# EAGLE board AetherTap100 (EAGLE 5.07)
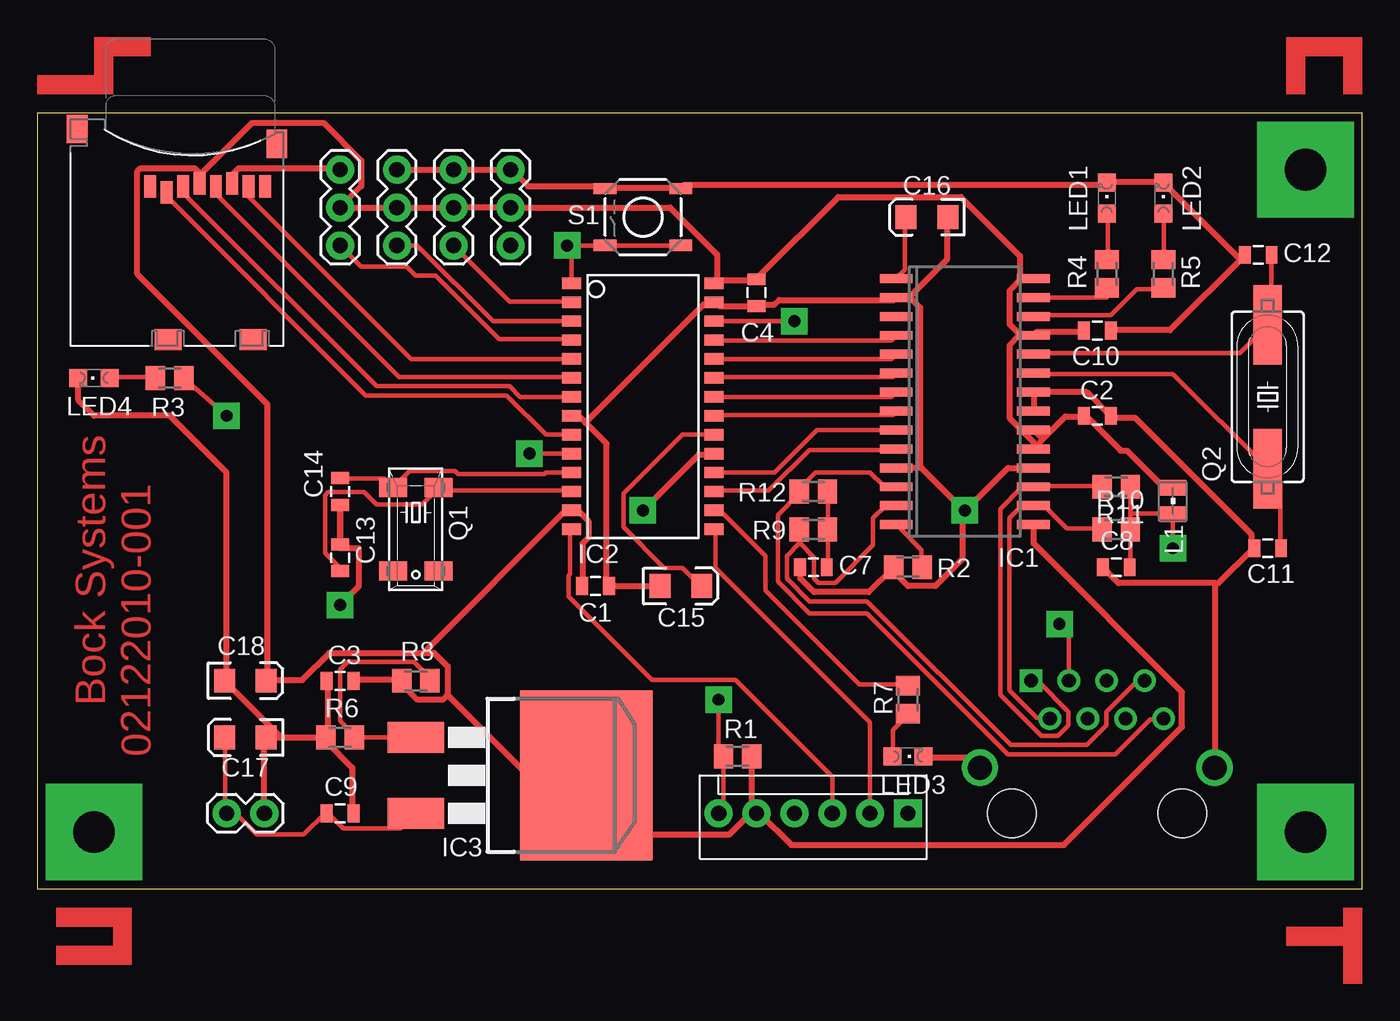
[diagram p0: board, top side]
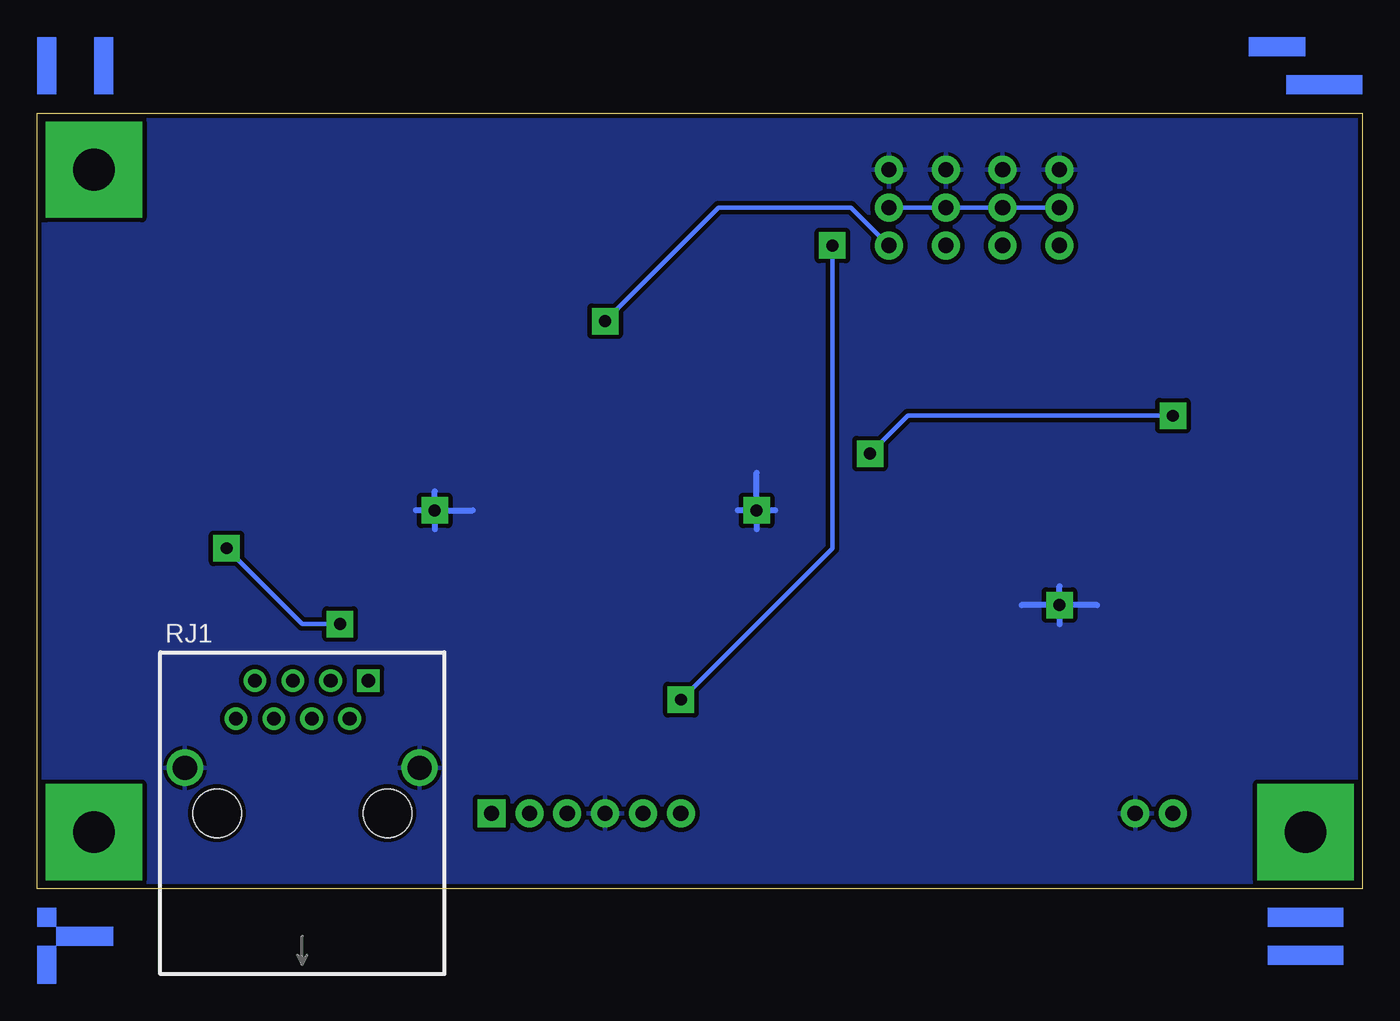
[diagram p1: board, bottom side, seen from below]

Size 88.9 x 52.07 mm. Coordinates in mm from the lower left corner, seen from the top.
Outline: 0,0 88.9,0 88.9,52.07 0,52.07 0,0
Copper layers (1*16): Top 0.035mm / dielectric 1.5mm / Bottom 0.035mm
Design rules "DesignRules *": minimum track width 12mil, minimum drill 20mil, track to track 8mil, track to pad 8mil, pad to pad 8mil, via to via 8mil, smd to smd 8mil, copper to edge 10mil, drill to drill 8mil, minimum pad ring 12mil, minimum via ring 10mil, stop-mask expansion 4mil, vias tented up to drill 25mil, thermal gap 10mil
Net classes: 0 default: width 0.305 mm, clearance 0.254 mm; 1 GND: width 0.406 mm, clearance 0.254 mm; 2 VCC: width 0.406 mm, clearance 0.254 mm

## Footprints (pad centres in the part's own frame; a part is rotated, then mirrored left to right if it is on the bottom)
0805 = smd 0.8 x 1.2: 1 -0.9,0; 2 0.9,0
EIA3216 = smd 1.4 x 1.6: A 1.4,0; C -1.4,0
SO28W = smd 0.6 x 2.2: 1 -8.255,-4.6; 2 -6.985,-4.6; 3 -5.715,-4.6; 4 -4.445,-4.6; 5 -3.175,-4.6; 6 -1.905,-4.6; 7 -0.635,-4.6; 8 0.635,-4.6; 9 1.905,-4.6; 10 3.175,-4.6; 11 4.445,-4.6; 12 5.715,-4.6; 13 6.985,-4.6; 14 8.255,-4.6; 15 8.255,4.6; 16 6.985,4.6; 17 5.715,4.6; 18 4.445,4.6; 19 3.175,4.6; 20 1.905,4.6; 21 0.635,4.6; 22 -0.635,4.6; 23 -1.905,4.6; 24 -3.175,4.6; 25 -4.445,4.6; 26 -5.715,4.6; 27 -6.985,4.6; 28 -8.255,4.6
SO28W' = smd 0.762 x 1.27: 1 -8.89,-4.78; 2 -7.62,-4.78; 3 -6.35,-4.78; 4 -5.08,-4.78; 5 -3.81,-4.78; 6 -2.54,-4.78; 7 -1.27,-4.78; 8 0,-4.78; 9 1.27,-4.78; 10 2.54,-4.78; 11 3.81,-4.78; 12 5.08,-4.78; 13 6.35,-4.78; 14 7.62,-4.78; 15 7.62,4.78; 16 6.35,4.78; 17 5.08,4.78; 18 3.81,4.78; 19 2.54,4.78; 20 1.27,4.78; 21 0,4.78; 22 -1.27,4.78; 23 -2.54,4.78; 24 -3.81,4.78; 25 -5.08,4.78; 26 -6.35,4.78; 27 -7.62,4.78; 28 -8.89,4.78
D2PACK = smd 2.083 x 3.81: 1 -2.54,-8.89; 3 2.54,-8.89 | smd 11.43 x 8.89: 2 0,2.54
MOLEX-1X6 = drill 1.016 pad 1.88 square: 1 0,0 | drill 1.016 pad 1.88 round: 2 2.54,0; 3 5.08,0; 4 7.62,0; 5 10.16,0; 6 12.7,0
1X03 = drill 1.016 pad 1.88 round: 1 0,0; 2 2.54,0; 3 5.08,0
1X02 = drill 1.016 pad 1.88 round: 1 0,0; 2 2.54,0
WE-KI_0805_B = smd 1.02 x 1.78: 1 -0.89,0; 2 0.89,0
CHIPLED_0805 = smd 1.2 x 1.2: A 0,-1.05; C 0,1.05
MM20SS = smd 1.27 x 1.88: 1 -2.794,-1.524; 2 2.794,-1.524; 3 2.794,1.524; 4 -2.794,1.524
HC49UP = smd 5.334 x 1.93: 1 -4.826,0; 2 4.826,0
M0805 = smd 1.3 x 1.6: 1 -0.95,0; 2 0.95,0
PJ-J1 = drill 0.914 square: 1 4.445,8.89 | drill 0.914 round: 2 3.175,6.35; 3 1.905,8.89; 4 0.635,6.35; 5 -0.635,8.89; 6 -1.905,6.35; 7 -3.175,8.89; 8 -4.445,6.35 | drill 1.626 round: S1 7.874,3.048; S2 -7.874,3.048 | hole 3.251: 5.715,0; -5.715,0
TACTILE_SWITCH_SMD = smd 1.524 x 0.762: 1 -2.54,1.905; 2 2.54,1.905; 3 -2.54,-1.905; 4 2.54,-1.905
MICROSD = smd 0.8 x 1.5: 1 -1.94,2.7; 2 -0.84,2.3; 3 0.26,2.7; 4 1.36,2.9; 5 2.46,2.7; 6 3.56,2.9; 7 4.66,2.7; 8 5.76,2.7 | smd 1.4 x 1.9: NC -6.85,6.55; NC3 6.55,5.55 | smd 1.8 x 1.4: NC1 -0.75,-7.6; NC2 4.95,-7.6

## Placement (x,y rotation side)
C1  0.1uF  [0805]  37.47,20.32 180 top
C2  0.1uF  [0805]  71.12,31.75 180 top
C3  0.1uF  [0805]  20.32,13.97 180 top
C4  0.1uF  [0805]  48.26,40.01 270 top
C7  0.1uF  [0805]  52.07,21.59 180 top
C8  0.1uF  [0805]  72.39,21.59 0 top
C9  0.1uF  [0805]  20.32,5.08 0 top
C10  0.1uF  [0805]  71.12,37.47 0 top
C11  27pF  [0805]  82.55,22.86 0 top
C12  27pF  [0805]  81.92,42.55 180 top
C13  27pF  [0805]  20.32,22.23 90 top
C14  27pF  [0805]  20.32,26.67 90 top
C15  10uF  [EIA3216]  43.18,20.32 0 top
C16  10uF  [EIA3216]  59.69,45.09 180 top
C17  10uF  [EIA3216]  13.97,10.16 180 top
C18  10uF  [EIA3216]  13.97,13.97 0 top
IC1  [SO28W]  62.23,32.7 270 top
IC2  PIC24FJ64GA002  [SO28W']  40.64,31.75 270 top
IC3  LM317BD2T  [D2PACK]  34.29,7.62 270 top
ICSP  PIC-ICSPPTH  [MOLEX-1X6]  58.42,5.08 180 top
JP1  [1X03]  27.94,48.26 270 top
JP2  [1X03]  24.13,48.26 270 top
JP3  [1X03]  20.32,48.26 270 top
JP4  [1X03]  31.75,48.26 270 top
JP5  [1X02]  15.24,5.08 180 top
L1  60Ohm  [WE-KI_0805_B]  76.2,26.04 90 top
LED1  [CHIPLED_0805]  71.75,46.35 0 top
LED2  [CHIPLED_0805]  75.56,46.35 0 top
LED3  [CHIPLED_0805]  58.42,8.89 270 top
LED4  [CHIPLED_0805]  3.81,34.29 90 top
Q1  32Khz  [MM20SS]  25.4,24.13 270 top
Q2  25Mhz  [HC49UP]  82.55,33.02 90 top
R1  2K0  [M0805]  46.99,8.89 180 top
R2  2K0  [M0805]  58.42,21.59 180 top
R3  390  [M0805]  8.89,34.29 180 top
R4  390  [M0805]  71.75,41.27 90 top
R5  390  [M0805]  75.56,41.27 90 top
R6  390  [M0805]  20.32,10.16 0 top
R7  390  [M0805]  58.42,12.7 90 top
R8  240  [M0805]  25.4,13.97 0 top
R9  50  [M0805]  52.07,24.13 180 top
R10  50  [M0805]  72.39,24.13 0 top
R11  50  [M0805]  72.39,26.99 0 top
R12  50  [M0805]  52.07,26.67 180 top
RJ1  J1006  [PJ-J1]  71.12,5.08 0 bottom
S1  [TACTILE_SWITCH_SMD]  40.64,45.09 180 top
SD1  SF-MICROSD  [MICROSD]  9.53,44.45 0 top

## Library data of the parts
C1-C4 C7-C18 ICSP JP1-JP5 S1 = SparkFun
IC1 = microchip-enc28j60
IC2 = microchip-pic24
IC3 = v-reg
L1 = wuerth-elektronik
LED1-LED4 = led
Q1 Q2 = crystal
R1-R12 = resistor
RJ1 = con-pulse-j1006
SD1 = microsd

## Nets
CLK1: C14.2 IC2.11 Q1.1
CLK2: C13.1 IC2.12 Q1.4
CTT: C8.2 L1.1 R10.2 R11.2 RJ1.3
ETH-CLK: IC1.8 IC2.21
ETH-CS: IC1.9 IC2.18
ETH-INT: IC1.4 IC2.25
ETH-LED: IC2.16 R7.2
ETH-MISO: IC1.6 IC2.23
ETH-MOSI: IC1.7 IC2.22
ETH-RST: IC1.10 IC2.17
ETH-WOL: IC1.5 IC2.24
GND [GND]: C1.1 C2.1 C3.2 C4.2 C7.2 C8.1 C9.2 C10.2 C11.1 C12.2 C13.2 C14.1 C15.C C16.C C17.C C18.C IC1.2 IC1.11 IC1.18 IC1.21 IC1.22 IC2.8 IC2.19 IC2.27 ICSP.4 JP1.1 JP2.1 JP3.1 JP4.1 JP5.1 LED1.C LED2.C LED3.C LED4.C R2.2 R6.1 RJ1.S1 RJ1.S2 S1.3 S1.4 SD1.6
LVP/AUX: ICSP.1
MCLR: IC2.1 ICSP.6 R1.2 S1.1 S1.2
MISO: IC2.5 SD1.7
MOSI: IC2.7 SD1.3
N$1: LED1.A R4.2
N$2: LED2.A R5.2
N$3: LED3.A R7.1
N$4: C16.A IC1.1
N$5: C9.1 C17.A IC3.3 JP5.2
N$6: IC1.14 R2.1
N$7: IC3.1 R6.2 R8.2
N$9: LED4.A R3.2
N$13: C7.1 R9.1 R12.1
N$16: IC1.26 R5.1
N$24: IC1.27 R4.1
OSC1: C11.2 IC1.23 Q2.1
OSC2: C12.1 IC1.24 Q2.2
PGC3: IC2.15 ICSP.2
PGD3: IC2.14 ICSP.3
RA0: IC2.2 JP1.3
RA1: IC2.3 JP2.3
RB0: IC2.4 JP3.3
RB15: IC2.26 JP4.3
SDCLK: IC2.6 SD1.5
SDCS: IC2.9 SD1.2
SDLED: IC2.10 R3.1
TPIN+: IC1.13 R9.2 RJ1.7
TPIN-: IC1.12 R12.2 RJ1.8
TPOUT+: IC1.17 R11.1 RJ1.1
TPOUT-: IC1.16 R10.1 RJ1.2
VCAP: C15.A IC2.20
VCC [GND]: C1.2 C2.2 C3.1 C4.1 C10.1 C18.A IC1.15 IC1.19 IC1.20 IC1.25 IC1.28 IC2.13 IC2.28 IC3.2 ICSP.5 JP1.2 JP2.2 JP3.2 JP4.2 L1.2 R1.1 R8.1 SD1.4

## Tracks (layer width: path | path; a pad name or v marks a point on that pad's centre or on a via)
CLK1
  Top 0.305: C14.2 20.32,27.53 23.27,27.53 Q1.1 24.99,28.04 28.04,28.04 28.25,27.84 34.04,27.84 34.14,27.94 IC2.11
CLK2
  Top 0.305: C13.1 20.32,21.54 19.3,22.55 19.3,26.42 19.51,26.62 21.95,26.62 22.76,25.81 25.81,25.81 Q1.4 26.92,26.72 35.76,26.72 IC2.12
CTT  (via drill 0.8 pad 1.78)
  Top 0.305: C8.2 73.36,21.64 73.36,24.08 R10.2 73.36,24.28 73.36,25.2 | 73.36,25.2 73.36,26.92 R11.2 | 73.36,25.2 76.2,25.2 L1.1 v76.2,22.86 | RJ1.3 69.22,17.14 v68.58,17.78
  Bottom 0.305: v68.58,17.78 71.12,17.78 v76.2,22.86
ETH-CLK
  Top 0.305: IC2.21 45.52,31.8 57.4,31.8 57.61,32 IC1.8
ETH-CS
  Top 0.305: IC2.18 49.48,27.94 52.32,30.79 57.61,30.79 IC1.9
ETH-INT
  Top 0.305: IC2.25 45.52,36.78 57.3,36.78 57.61,37.08 IC1.4
ETH-LED
  Top 0.305: IC2.16 45.82,25.4 48.87,22.35 48.87,20.02 55.17,13.72 58.42,13.72 R7.2
ETH-MISO
  Top 0.305: IC2.23 45.52,34.34 57.4,34.34 57.61,34.54 IC1.6
ETH-MOSI
  Top 0.305: IC2.22 57.3,33.02 57.61,33.33 IC1.7
ETH-RST
  Top 0.305: IC2.17 45.52,26.72 49.07,26.72 51.82,29.46 57.61,29.46 IC1.10
ETH-WOL
  Top 0.305: IC2.24 57.3,35.56 57.61,35.87 IC1.5
GND  (via drill 0.8 pad 1.78)
  Top 0.406: C15.C C1.1 38.2,20.42 38.2,29.87 36.78,31.29 | 36.78,31.29 36.37,31.7 35.87,31.7 IC2.8 | C16.C 61.06,45.01 61.06,42.27 58.52,39.73 57.71,39.73 IC1.2 | IC1.2 57.51,39.52 49.78,39.52 49.48,39.22 48.36,39.22 C4.2 45.72,39.12 45.52,39.32 IC2.27 45.31,39.22 44.7,39.22 36.78,31.29 | C10.2 72.03,37.49 76,37.49 80.97,42.47 C12.2 80.67,42.27 75.69,47.24 LED2.C 75.49,47.45 71.83,47.45 LED1.C 71.63,47.24 43.38,47.24 43.28,47.14 S1.3 43.18,47.04 38.1,47.04 S1.4 38,47.14 32.92,47.14 31.8,48.26 JP4.1 JP2.1 | IC1.21 66.85,32.11 66.85,33.12 IC1.22 66.85,33.33 70.41,33.33 71.93,31.8 C2.1 72.14,31.6 73.66,31.6 81.48,23.77 81.48,22.96 C11.1 81.58,22.86 79.25,20.52 79.05,20.52 | C9.2 21.13,5.08 21.13,8.13 19.41,9.86 19.41,10.16 R6.1 | C3.2 19.51,13.92 19.51,10.26 R6.1 | 16.26,10.16 C17.C 15.24,10.06 JP5.1 | 16.26,10.16 R6.1 | 16.26,10.16 16.26,10.26 12.6,13.92 C18.C 12.7,14.1 12.7,27.94 8.89,31.75 3.81,31.75 2.76,32.8 LED4.C | C13.2 C14.1 20.32,22.86 21.59,22.86 21.59,20.32 v20.32,19.05 | LED3.C 59.54,8.84 62.48,8.84 63.2,8.13 RJ1.S1 | v40.64,25.4 44.4,29.16 45.41,29.16 IC2.19 | 59.23,28.25 59.33,28.25 62.18,25.4 v62.23,25.4 | 59.23,28.25 57.71,28.25 IC1.11 | IC1.18 66.75,28.25 65.13,28.25 62.38,25.5 v62.23,25.4 | 78.94,8.13 RJ1.S2 79.05,8.23 79.05,20.52 | IC1.2 58.62,39.62 59.23,39.01 59.23,28.25 | v62.23,25.4 62.08,25.3 | C7.2 51.21,21.54 51.21,20.83 52.12,19.91 55.78,19.91 57.4,21.54 R2.2 57.4,21.34 58.42,20.32 60.25,20.32 62.08,22.15 62.08,25.09 v62.23,25.4 | 79.05,20.52 72.54,20.52 71.53,21.54 C8.1 | JP3.1 20.22,48.36 13.51,48.36 13.11,47.95 13.11,47.45 SD1.6
  Bottom 0.406: 17.78,19.05 v20.32,19.05 | v20.32,19.05 22.86,19.05 | v20.32,19.05 20.32,20.32 | v20.32,19.05 20.32,17.78 | v40.64,25.4 40.64,27.94 | v40.64,25.4 40.64,24.13 | 39.37,25.4 v40.64,25.4 | v40.64,25.4 41.91,25.4 | v62.23,25.4 59.69,25.4 | v62.23,25.4 63.5,25.4 | v62.23,25.4 62.23,26.67 | v62.23,25.4 62.23,24.13
  pour Bottom (isolate 0.305): 0,57.15 0,0 88.9,0 88.9,57.15
MCLR  (via drill 0.8 pad 1.78)
  Top 0.305: ICSP.6 46.04,5.4 R1.2 45.72,9.21 v45.72,12.7 | IC2.1 35.87,43.08 v35.56,43.18 S1.2 S1.1
  Bottom 0.305: v45.72,12.7 35.56,22.86 v35.56,43.18
MISO
  Top 0.305: IC2.5 25.09,35.56 14.22,46.43 14.22,47.14 SD1.7
MOSI
  Top 0.305: IC2.7 32.41,33.02 31.7,33.73 22.76,33.73 9.86,46.63 9.86,47.14 SD1.3
N$1
  Top 0.305: LED1.A 71.83,45.21 71.83,42.27 R4.2
N$2
  Top 0.305: LED2.A 75.59,45.21 75.59,42.27 R5.2
N$3
  Top 0.305: LED3.A 57.4,8.94 57.4,10.67 58.42,11.68 R7.1
N$4
  Top 0.305: C16.A 58.22,45.01 58.22,41.55 57.71,41.05 IC1.1
N$5
  Top 0.305: C17.A 12.6,10.16 12.6,5.18 JP5.2 12.8,4.98 13.41,4.98 14.73,3.66 17.88,3.66 19.3,5.08 C9.1 19.51,5.08 20.52,4.06 24.38,4.06 IC3.3
N$6
  Top 0.305: 57.71,24.38 IC1.14 57.81,24.28 59.33,22.76 59.33,21.64 R2.1
N$7
  Top 0.305: IC3.1 R6.2 21.34,10.26 20.32,11.28 20.32,14.73 20.83,15.24 25.3,15.24 26.31,14.22 26.31,14.02 R8.2
N$8  (via drill 2.8 pad 6.45)
  other vias: 85.09,48.26
N$9
  Top 0.305: LED4.A 4.88,34.34 7.92,34.34 R3.2
N$10  (via drill 2.8 pad 6.45)
  other vias: 85.09,3.81
N$11  (via drill 0.8 pad 1.78)
  other vias: 20.32,19.05
N$12  (via drill 2.8 pad 6.45)
  other vias: 3.81,3.81
N$13
  Top 0.305: C7.1 53.03,21.64 53.03,24.08 R9.1 53.03,24.28 53.03,26.62 R12.1
N$14  (via drill 0.8 pad 1.78)
  other vias: 40.64,25.4
N$15  (via drill 0.8 pad 1.78)
  other vias: 62.23,25.4
N$16
  Top 0.305: R5.1 75.49,40.23 73.76,40.23 72.03,38.51 66.85,38.51 IC1.26
N$24
  Top 0.305: IC1.27 71.75,39.69 R4.1
OSC1
  Top 0.305: C11.2 83.41,22.86 83.41,27.33 Q2.1 76.2,34.54 66.85,34.54 IC1.23
OSC2
  Top 0.305: C12.1 82.8,42.47 82.8,38.1 Q2.2 80.67,35.97 66.85,35.97 IC1.24
PGC3
  Top 0.305: ICSP.2 55.88,11.18 45.52,21.54 45.52,24.08 IC2.15
PGD3
  Top 0.305: ICSP.3 53.34,7.52 46.84,14.02 41.25,14.02 35.66,19.61 35.66,21.03 35.76,21.13 35.76,24.08 IC2.14
RA0
  Top 0.305: JP1.3 31.7,39.42 35.76,39.42 IC2.2
RA1
  Top 0.305: IC2.3 30.58,38.1 25.5,43.18 JP2.3
RB0
  Top 0.305: JP3.3 21.74,41.76 24.79,41.76 25.4,41.15 26.72,41.15 30.99,36.88 35.76,36.88 IC2.4
RB15  (via drill 0.8 pad 1.78)
  Top 0.305: v50.8,38.1 IC2.26
  Bottom 0.305: v50.8,38.1 43.18,45.72 34.29,45.72 JP4.3
SDCLK
  Top 0.305: IC2.6 35.76,34.34 24.28,34.34 11.99,46.63 SD1.5
SDCS
  Top 0.305: IC2.9 34.14,30.48 31.5,33.12 22.05,33.12 8.74,46.43 8.74,46.74 SD1.2
SDLED  (via drill 0.8 pad 1.78)
  Top 0.305: v33.02,29.21 IC2.10 | R3.1 v12.7,31.75
  Bottom 0.305: v33.02,29.21 30.48,31.75 v12.7,31.75
TPIN+
  Top 0.305: 51.21,23.16 51.21,24.08 R9.2 | 51.21,23.16 52.12,22.25 52.12,20.83 52.43,20.52 53.54,20.52 56.08,23.06 56.08,24.89 56.9,25.7 57.61,25.7 IC1.13 | RJ1.7 74.27,13.92 73.76,13.92 71.73,11.89 71.73,10.97 70.41,9.65 65.33,9.65 55.68,19.3 51.82,19.3 50.29,20.83 50.29,22.35 51.1,23.16 51.21,23.16
TPIN-
  Top 0.305: IC1.12 57.61,27.03 56.79,27.03 55.88,27.94 52.22,27.94 51.21,26.92 51.21,26.72 R12.2 51.1,26.52 49.68,25.09 49.68,20.62 51.82,18.49 55.68,18.49 65.13,9.04 72.34,9.04 74.68,11.38 75.49,11.38 RJ1.8
TPOUT+
  Top 0.305: R11.1 71.42,27.03 66.85,27.03 IC1.17 66.75,26.92 66.04,26.92 64.62,25.5 64.62,13.01 67.36,10.26 68.48,10.26 69.19,10.97 69.19,11.89 67.16,13.92 66.75,13.92 RJ1.1
TPOUT-
  Top 0.305: R10.1 71.42,24.18 69.09,24.18 67.56,25.7 66.85,25.7 IC1.16 66.75,25.6 65.94,25.6 65.23,24.89 65.23,13.31 67.06,11.48 67.87,11.48 RJ1.2
VCAP
  Top 0.305: IC2.20 43.28,30.48 39.32,26.52 39.32,24.28 42.06,21.54 43.28,21.54 44.5,20.32 C15.A
VCC
  Top 0.406: ICSP.5 47.95,5.38 47.95,8.84 R1.1 | C1.2 36.58,23.16 36.98,23.57 36.98,24.69 36.27,25.4 IC2.13 35.46,25.4 26.01,15.95 26.01,15.85 | C3.1 21.23,14.02 24.38,14.02 R8.1 24.38,13.82 25.5,12.7 27.23,12.7 27.53,13.01 | 26.01,15.85 26.62,15.85 27.53,14.94 27.53,13.01 | 26.01,15.85 19.61,15.85 17.78,14.02 15.44,14.02 C18.A 15.44,14.22 15.44,32.51 6.71,41.25 6.71,48.16 6.91,48.36 10.57,48.36 10.87,48.06 SD1.4 10.97,47.45 10.97,47.95 14.43,51.41 19.2,51.41 21.74,48.87 21.74,47.14 JP3.2 JP2.2 JP1.2 JP4.2 42.47,45.72 45.62,42.57 45.62,40.95 IC2.28 45.52,40.64 45.72,40.84 48.26,40.84 C4.1 48.36,41.05 53.75,46.43 61.98,46.43 65.94,42.47 65.94,41.05 IC1.28 66.75,40.95 66.04,40.95 65.23,40.13 65.23,37.9 65.94,37.19 66.65,37.19 IC1.25 | 27.53,13.01 32.92,7.62 IC3.2 36.98,7.52 40.84,3.66 46.43,3.66 47.95,5.18 ICSP.5 | C10.1 70.21,37.39 67.06,37.39 66.85,37.19 IC1.25 | 67.06,29.77 66.85,29.57 IC1.19 | 67.06,29.77 67.46,30.18 | 67.46,30.18 68.99,31.7 70.21,31.7 C2.2 70.41,31.7 72.69,29.41 73.1,29.41 75.49,27.03 76.2,27.03 L1.2 | IC1.20 66.85,30.79 67.46,30.18 | IC1.25 65.84,37.08 65.23,36.47 65.23,31.6 67.06,29.77 | IC1.15 66.85,24.38 66.85,23.16 76.81,13.21 76.81,10.87 68.89,2.95 50.6,2.95 48.46,5.08 ICSP.5
  Bottom 0.305: JP3.2 JP4.2
(copper drawn outside any net)
  shapes: Bottom area x10, Top area x11

## Text on the board
Top: Bock Systems | 02122010-001
tTest: 1 | 2 | 3 | 4 | - | + | IO | VIN | GND | 1 | ICSP